# EAGLE board ESP8266_Programmer (EAGLE 9.2.2)
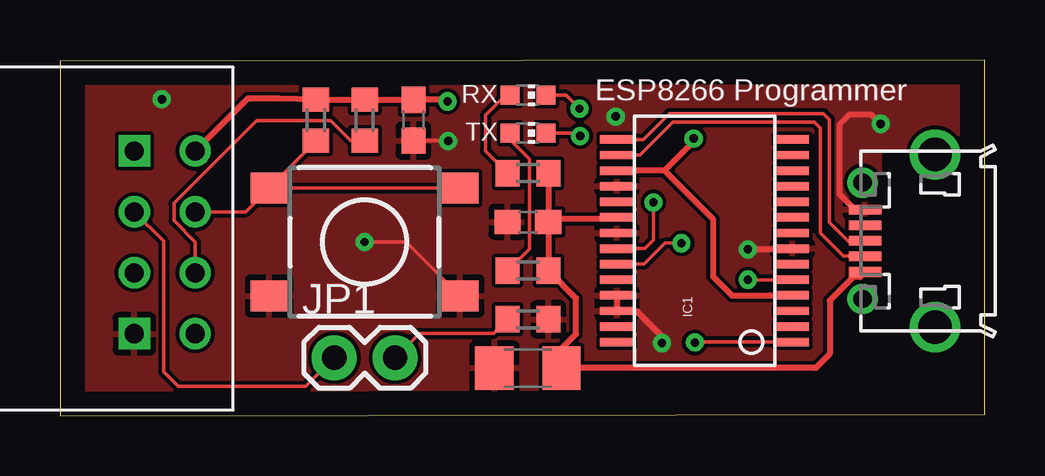
[diagram p0: board, top side]
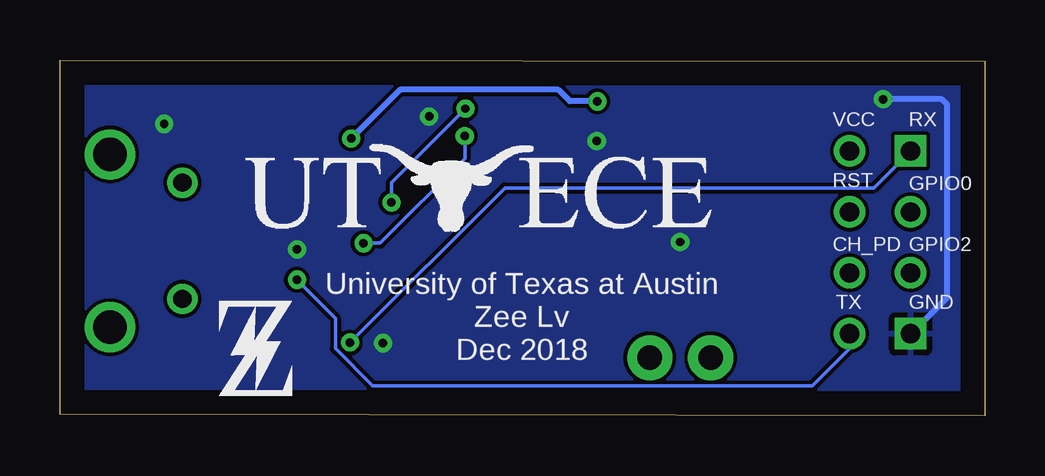
[diagram p1: board, bottom side, seen from below]

Size 38.56 x 14.83 mm. Coordinates in mm from the lower left corner, seen from the top.
Outline: 0,0 38.56,0.05 38.56,14.83 0,14.78 0,0
Copper layers (1*16): Top 0.035mm / dielectric 1.5mm / Bottom 0.035mm
Design rules "default": minimum track width 6mil, minimum drill 0.35mm, track to track 6mil, track to pad 6mil, pad to pad 6mil, via to via 6mil, smd to smd 6mil, copper to edge 40mil, drill to drill 6mil, minimum pad ring 10mil, minimum via ring 8mil, stop-mask expansion 4mil, vias tented up to drill 0mil, thermal gap 10mil

## Footprints (pad centres in the part's own frame; a part is rotated, then mirrored left to right if it is on the bottom)
C0603 = smd 1.1 x 1: 1 -0.85,0; 2 0.85,0
C1206 = smd 1.6 x 1.8: 1 -1.4,0; 2 1.4,0
ESP01 = drill 0.8: CH_PD -1.285,-8.178; GPIO0 1.255,-5.638; GPIO2 -1.285,-5.638; RST 1.255,-8.178; TX -3.825,-8.178; VCC 3.795,-8.178 | drill 0.8 square: GND -3.825,-5.638; RX 3.795,-5.638
SSOP28DB = smd 0.348 x 1.397: 1 -4.225,-3.656; 2 -3.575,-3.656; 3 -2.925,-3.656; 4 -2.275,-3.656; 5 -1.625,-3.656; 6 -0.975,-3.656; 7 -0.325,-3.656; 8 0.325,-3.656; 9 0.975,-3.656; 10 1.625,-3.656; 11 2.275,-3.656; 12 2.925,-3.656; 13 3.575,-3.656; 14 4.225,-3.656; 15 4.225,3.656; 16 3.575,3.656; 17 2.925,3.656; 18 2.275,3.656; 19 1.625,3.656; 20 0.975,3.656; 21 0.325,3.656; 22 -0.325,3.656; 23 -0.975,3.656; 24 -1.625,3.656; 25 -2.275,3.656; 26 -2.925,3.656; 27 -3.575,3.656; 28 -4.225,3.656
1X02 = drill 1.016 pad 1.88: 1 0,0; 2 2.54,0
CHIP-LED0603 = smd 0.8 x 0.8: A 0,-0.75; C 0,0.75
R0603 = smd 1 x 1.1: 1 -0.85,0; 2 0.85,0
DTSM-6 = smd 1.55 x 1.3: 1 -3.975,2.25; 2 3.975,2.25; 3 -3.975,-2.25; 4 3.975,-2.25
USB_MICRO_PTH = smd 1.35 x 0.4: 1 4.825,1.3; 2 4.825,0.65; 3 4.825,0; 4 4.825,-0.65; 5 4.825,-1.3 | drill 1.397: S1 1.905,-3.6; S2 1.905,3.6 | drill 0.762: S3 4.923,2.425; S4 4.923,-2.425

## Placement (x,y rotation side)
C1  0.1uF  [C0603]  19.51,8.08 180 top
C2  0.1uF  [C0603]  14.73,12.32 270 top
C3  10uF  [C1206]  19.51,1.98 180 top
ESP8266  ESP01  [ESP01]  -2.54,7.24 90 top
IC1  FT232RLSSOP  [SSOP28DB]  26.87,7.29 90 top
JP1  [1X02]  11.43,2.41 0 top
LED1  [CHIP-LED0603]  19.51,11.79 270 top
LED2  [CHIP-LED0603]  19.51,13.36 270 top
R1  10k  [R0603]  19.51,4.01 180 top
R2  10k  [R0603]  10.67,12.32 90 top
R3  1k  [R0603]  19.51,6.05 0 top
R4  1k  [R0603]  19.51,10.11 0 top
R5  10k  [R0603]  12.7,12.32 90 top
RESET  DTSM-6  [DTSM-6]  12.7,7.24 0 top
U$1  [Z_LOGO]  31.93,0.81 0 bottom
U$2  [UT_ECE_LOGO]  31.29,7.39 0 bottom
U$3  USB_MICRO_PTH  [USB_MICRO_PTH]  38.38,7.29 180 top

## Library data of the parts
C1-C3 = rcl; SPICEPREFIX: C
ESP8266 = esp8266
IC1 JP1 = SparkFun
LED1 LED2 = led
R1-R5 = rcl; SPICEPREFIX: R
RESET = switch-tact
U$1-U$3 = Z

## Nets
+3V3: C2.1 ESP8266.VCC IC1.4 IC1.17 R2.2 R5.2
+5V: C1.1 C3.1 IC1.20 R3.2 R4.2 U$3.1
D+: IC1.15 U$3.3
D-: IC1.16 U$3.2
GND: C1.2 C2.2 C3.2 ESP8266.GND IC1.7 IC1.18 IC1.21 IC1.25 IC1.26 R1.1 RESET.3 RESET.4 U$3.5
N$1: ESP8266.CH_PD R5.1
N$2: JP1.2 R1.2
N$5: ESP8266.GPIO0 JP1.1
N$6: LED1.A R3.1
N$7: LED2.A R4.1
N$8: IC1.23 LED1.C
N$9: IC1.22 LED2.C
RST: ESP8266.RST R2.1 RESET.1 RESET.2
RX-TX: ESP8266.TX IC1.5
TX-RX: ESP8266.RX IC1.1

## Tracks (layer width: path | path; a pad name or v marks a point on that pad's centre or on a via)
+3V3  (via drill 0.35)
  Top 0.254: ESP8266.VCC 7.83,13.23 9.14,13.23 R2.2 12.9,13.17 12.91,13.18 R5.2 C2.1 14.75,13.18 16.08,13.18 v16.15,13.11 | IC1.4 29.58,5.02 29.57,5.01 28.01,5.01 27.23,5.79 27.23,8.2 25.2,10.22 | 25.2,10.22 IC1.17 | 25.2,10.22 26.42,11.44 v26.42,11.56
  Bottom 0.254: v26.42,11.56 24.38,13.59 17.78,13.59 17.3,13.11 v16.15,13.11
+5V
  Top 0.254: IC1.20 23.29,8.27 23.23,8.2 20.48,8.2 C1.1 | U$3.1 33.34,5.78 33.08,5.78 32.09,4.79 32.09,2.57 31.5,1.98 C3.1 20.91,2.8 21.51,3.4 21.51,4.89 R3.2 C1.1 | R4.2 C1.1
D+
  Top 0.152: IC1.15 24.32,11.52 25.4,12.6 31.83,12.6 32.08,12.34 32.08,8.05 32.84,7.29 U$3.3
D-
  Top 0.152: IC1.16 24.18,10.87 25.55,12.24 31.45,12.24 31.7,11.99 31.7,7.62 32.66,6.66 33.54,6.66 U$3.2
GND  (via drill 0.35)
  Top 0.152: IC1.7 30.5,6.93 | RESET.4 14.43,7.24 v12.7,7.24 | C2.2 16.17,11.47 v16.18,11.45
  Top 0.254: v25.09,3.02 25.09,3.3 24.03,4.36 IC1.26 IC1.25 | 30.5,6.93 v28.68,6.93 | U$3.5 33.13,8.59 32.51,9.21 32.51,12.17 32.89,12.55 33.83,12.55 v34.21,12.17
  Bottom 0.254: ESP8266.GND 1.57,4.94 1.57,12.98 1.79,13.19 v4.24,13.19
  other vias: 23.16,12.47
  pour Top: 0.51,14.63 0.51,0.23 37.92,0.23 37.92,14.63
  pour Bottom: 0.51,14.63 0.51,0.23 37.92,0.23 37.92,14.63
N$1
  Top 0.152: R5.1 12.12,11.47 11.29,12.3 8.2,12.3 4.75,8.86 4.75,8.13 5.64,7.25 ESP8266.CH_PD
N$2
  Top 0.152: JP1.2 14.99,3.43 18.07,3.43 R1.2
N$5
  Top 0.152: ESP8266.GPIO0 4.32,7.27 4.32,1.83 4.92,1.23 10.24,1.23 JP1.1
N$6
  Top 0.152: LED1.A 18.76,11.51 19.56,10.7 19.56,6.95 R3.1
N$7
  Top 0.152: LED2.A 18.57,13.36 17.73,12.52 17.73,11.04 R4.1
N$8  (via drill 0.35)
  Top 0.152: v25.91,7.19 25.22,7.19 24.35,6.31 IC1.23 | v21.68,11.66 21.55,11.79 LED1.C
  Bottom 0.152: v21.68,11.66 21.68,10.72 25.21,7.19 v25.91,7.19
N$9  (via drill 0.35)
  Top 0.152: v24.74,8.89 24.74,7.31 24.39,6.96 IC1.22 | v21.65,12.8 21.09,13.36 LED2.C
  Bottom 0.152: v24.74,8.89 24.74,9.72 v21.65,12.8
RST
  Top 0.152: ESP8266.RST 7.73,8.49 RESET.1 | R2.1 10.5,11.26 RESET.1 | RESET.1 RESET.2
RX-TX  (via drill 0.35)
  Top 0.152: IC1.5 v28.68,5.66 | v28.68,5.66
  Bottom 0.152: v28.68,5.66 27.07,4.06 27.07,2.8 25.52,1.24 7.19,1.24 5.64,2.8 ESP8266.TX
TX-RX  (via drill 0.35)
  Top 0.152: IC1.1 26.48,3.06 v26.47,3.05
  Bottom 0.152: v26.47,3.05 20.02,9.5 4.63,9.5 ESP8266.RX

## Text on the board
tPlace: RX | ESP8266 Programmer | TX
bPlace: RX | VCC | GPIO0 | RST | GPIO2 | CH_PD | GND | TX | University of Texas at Austin / Zee Lv / Dec 2018